# Altium PCB TPI_Carte_Alimentation.PcbDoc
Units mm, origin at the board's own origin, x right, y up, seen from the top; angles counter-clockwise.
Board outline 102.05 x 48.01 mm, 2 copper layers (Top Layer, Bottom Layer); 7 components, 9 nets, 39 pads, 0 vias.
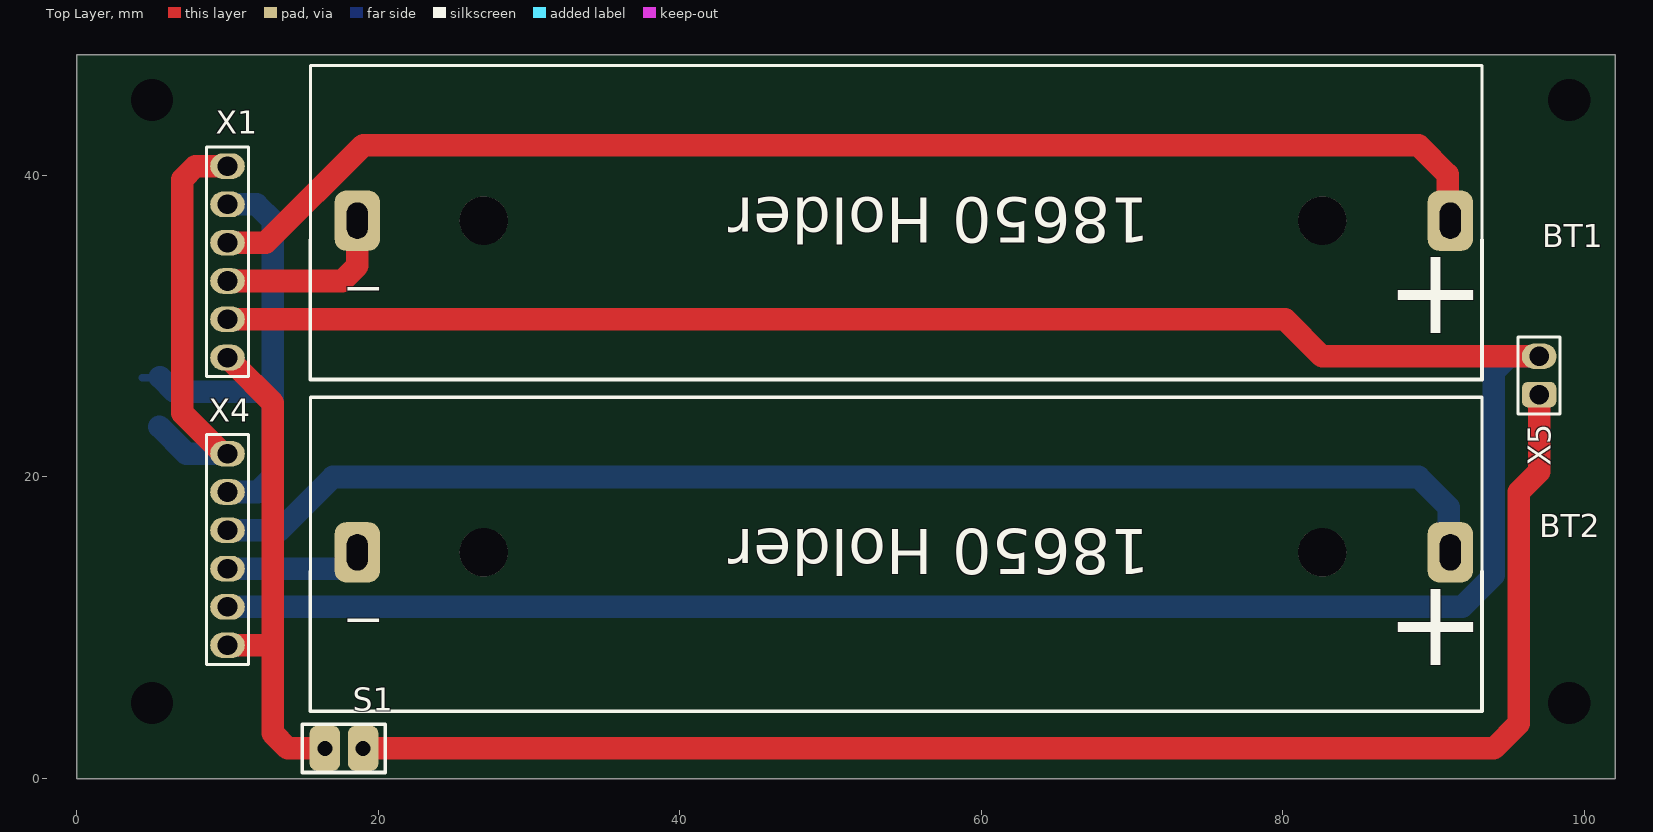
[diagram p0: Top Layer view]
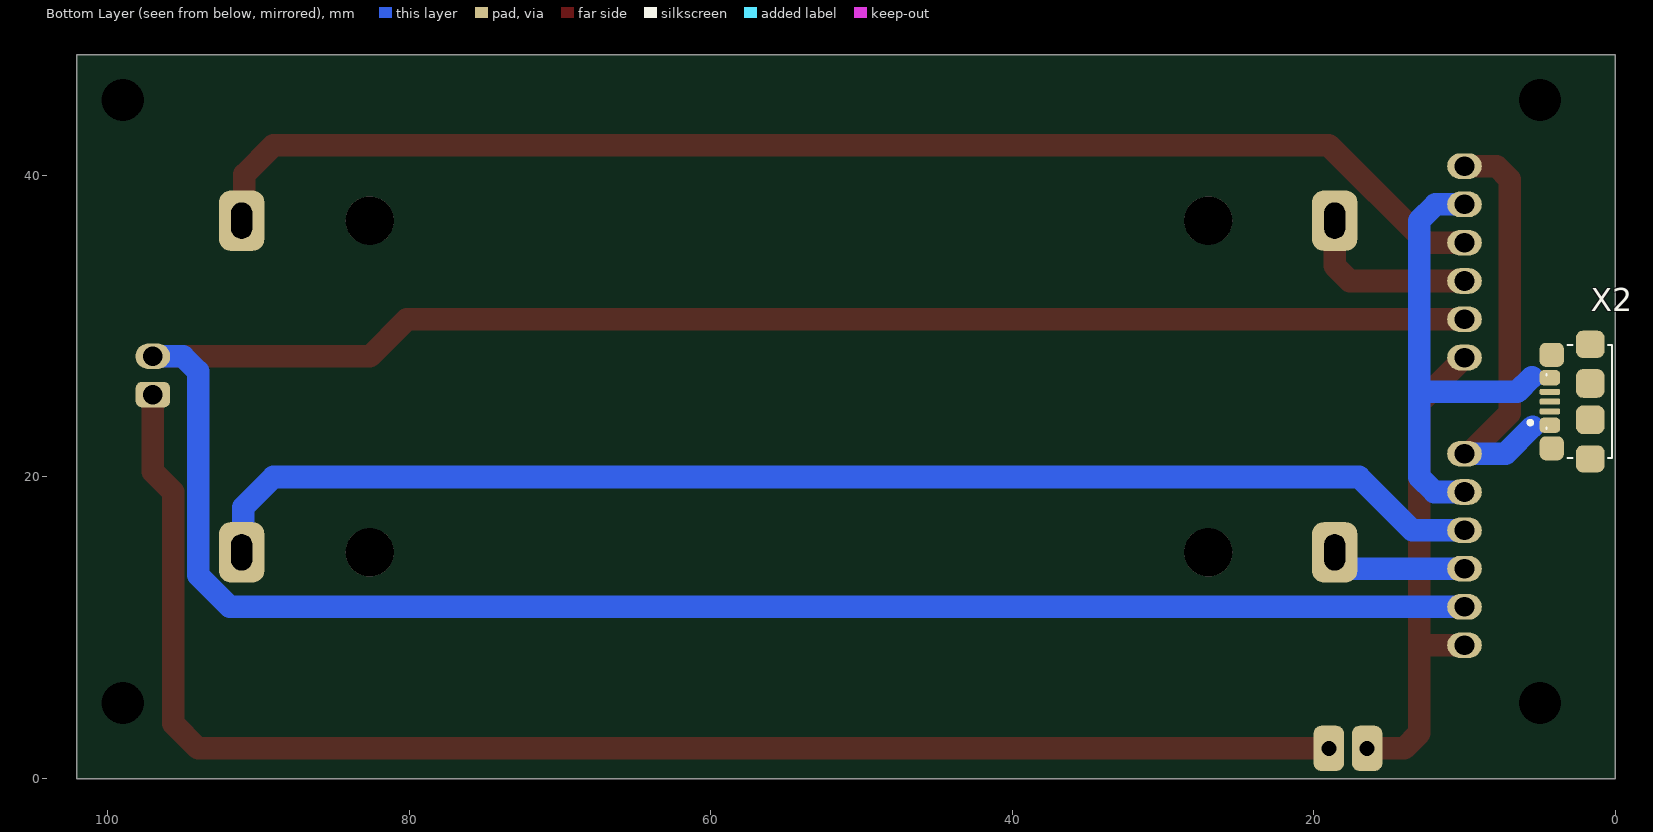
[diagram p1: Bottom Layer view, seen from below]
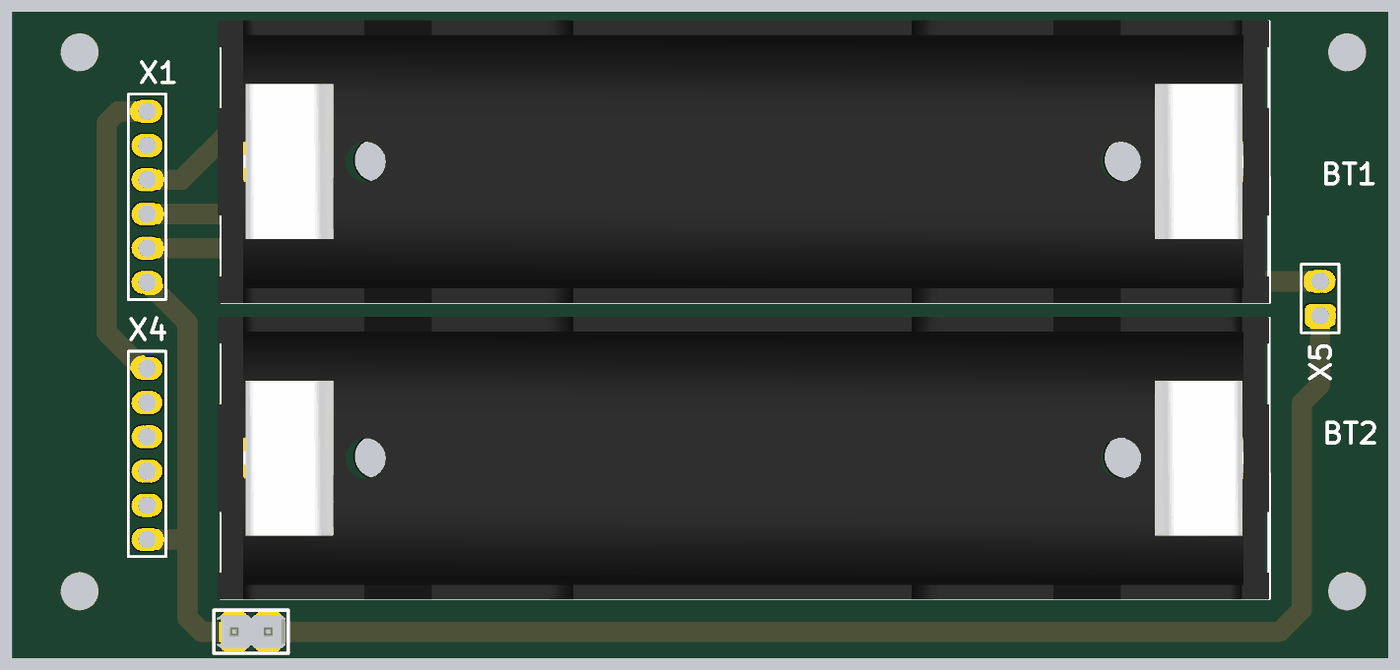
[diagram p2: 3D render of the assembled board from above, using the file's embedded part models]

## Layer stack, top to bottom
Top Solder: solder mask 0.0102, Solder Resist, Dk 3.5
Top Layer: signal copper 0.0356
Dielectric1: dielectric 0.32, FR-4, Dk 4.8
Bottom Layer: signal copper 0.0356
Bottom Solder: solder mask 0.0102, Solder Resist, Dk 3.5

## Board outline
0,-0.003 102.05,-0.003 102.05,48.006 0,48.006

## Design rules (kind name [scope] priority, off if disabled: settings)
Clearance [All] p1: gap=0.2 ignorepadtopadclearanceinfootprint=FALSE except(0: Arc-Hole Track-Hole SMDPad-Hole THPad-Hole Via-Hole Fill-Hole Poly-Hole Region-Hole Text-Hole)
FabricationTestPointUsage TestPointUsage [All] p1: valid=0 allowmultiple=FALSE
FabricationTestpoint Testpoint [All] p1: side=3 testpointundercomponent=TRUE minsize=1.016 maxsize=2.54 preferedsize=1.524 minholesize=0 maxholesize=1.016 preferedholesize=0.813 testpointgrid=0.025 allowsidetop=TRUE allowsidebottom=TRUE usegrid=TRUE gridtolerance=0
HoleSize [All] p1: absolutevalues=TRUE maxlimit=5 minlimit=0.8 maxpercent=80.000 minpercent=20.000
HoleToHoleClearance [All] p1: gap=0.2 allowstackedmicrovias=TRUE
MinimumSolderMaskSliver [All] p1: minsoldermaskwidth=0.1
PlaneClearance [All] p1: clearance=0.5
PlaneConnect [All] p1: planeconnectstyle=Relief reliefexpansion=0.5 reliefentries=4 reliefconductorwidth=0.5 reliefairgap=0.3
PolygonConnect [All] p1: connectstyle=Relief reliefconductorwidth=0.254 reliefentries=4 polygonreliefangle="90 Angle" airgapwidth=0.254
RoutingVias [All] p1: holewidth=0.8 width=1.8 viastyle="Through Hole" minholewidth=0.8 minwidth=1.8 maxholewidth=1.7 maxwidth=3
SilkToSilkClearance [All] p1: silktosilkclearance=0.2
SilkToSolderMaskClearance SilkscreenOverComponentPads [IsPad] p1: minsilkscreentomaskgap=0.254 clearancetoexposedcopper=TRUE
SolderMaskExpansion [All] p1: expansion=0.102 istentingtop=FALSE
Width [All] p1: maxlimit=2 minlimit=0.2 preferedwidth=0.5
21 further rules are at their usual default settings.

## Components (designator, comment, footprint, x,y, rotation, side; value= is the part's Value field where it differs from the comment)
BT1 "Batterie 3.7 V" 18650Holder_V1 91.11,37 r180 top
BT2 "Batterie 3.7 V" 18650Holder_V1 91.11,15 r180 top
S1 "?" MOLEX_0022284020 16.46,2 r0 top
X1 "Header6x1_M" HDR6X1_M 10,34.27 r270 top
X2 "Micro_USB" MICRO_USB 3,25 r90 bottom
X4 "Header6x1_M" HDR6X1_M 10,15.19 r270 top
X5 "Header2x1_M" HDR2X1_M 97,26.73 r90 top

## Footprints (in the part's own frame and the unit in brackets; to place one, negate y for a bottom-side part, rotate by r counter-clockwise, add the part's x,y. Pads: shape width x height; smd on the part's side, far side on the other; paste and mask are expansions set on the pad)
18650Holder_V1 [mm] "VF_Divers_E05_V1.0_Support18650PCB"
  rrect50% 3x4 hole 1.4 slot 2.4 at 90 deg: 1(0,0) 2(72.5,0)
  round 3.2 hole 3.2 unplated: ""(8.5,0) ""(64.11,0)
  silkscreen extent -2.1,-10.29 75.62,10.54, body extent -2.1,-10.37 75.9,10.63, height 21.1
HDR2X1_M [mm] "Connector; Header; 2x1 Position; Straight"
  rrect50% 1.7x2.3 hole 1.3: 1(-1.27,0)
  oval 1.7x2.3 hole 1.3: 2(1.27,0)
  silkscreen extent -2.54,-1.4 2.54,1.4, body extent -2.54,-1.27 2.54,1.27, height 9.27
HDR6X1_M [mm] "Connector; Header; 6x1 Position; Straight"
  oval 1.7x2.3 hole 1.3: 1(-6.35,0) 2(-3.81,0) 3(-1.27,0) 4(1.27,0) 5(3.81,0) 6(6.35,0)
  silkscreen extent -7.62,-1.4 7.62,1.4, body extent -7.61,-1.27 7.63,1.27, height 9.27
MICRO_USB [mm] "Connecteur USB micro B"
  rrect50% 1x1.35 smd: 1(-1.57,1.338) 5(1.58,1.338)
  rrect50% 0.4x1.35 smd: 2(-0.65,1.338) 3(0,1.338) 4(0.65,1.338)
  rrect50% 1.8x1.9 smd: ""(-3.8,-1.338) ""(3.8,-1.338)
  rrect50% 1.6x1.6 smd: ""(-3.1,1.212) ""(3.1,1.212)
  rrect50% 1.9x1.9 smd: ""(-1.2,-1.338) ""(1.2,-1.338)
  silkscreen extent -3.75,-2.79 3.75,2.74
MOLEX_0022284020 [mm] "JUMPER"
  rrect50% 2.032x3 hole 1: 1(0,0) 2(2.54,0)
  silkscreen extent -1.5,-1.6 4,1.6, body extent -1.27,-1.24 3.81,1.24, height 8.39

## Part data
BT1 BT2: library part Battery, "Multicell Battery", LatestRevisionDate=17-Jul-2002, LatestRevisionNote="Re-released for DXP Platform.", PackageDescription="Battery; 2 Leads", PackageReference=BAT-2, Published=24-Mar-1999, Publisher="Altium Limited"
S1: library part Switch_NO, "Switch Normaly Open"
X1 X4: library part CMP-031-000013-3, "WURTH ELEKTRONIK - 61300611121 - Pin Header, Board-to-Board, 2.54 mm, 1 Rows, 6 Contacts, Through Hole, WR-PHD Series", Color=Black, Current Rating=3A, Manufacturer="Wurth Electronics", Manufacturer Part Number=61300611121, Max Operating Temperature=125°C, Min Operating Temperature=-40°C, Voltage Rating=250V, Category="Headers and Wire Housings", ComponentLink1Description=http://www.mouser.com/ds/2/445/6130xx11121-538006.pdf?src-supplier=Mouser, ComponentLink1URL=http://www.mouser.com/ds/2/445/6130xx11121-538006.pdf?src-supplier=Mouser, ComponentLink2Description=https://katalog.we-online.de/em/datasheet/6130xx11121.pdf?src-supplier=Digi-Key, ComponentLink2URL=https://katalog.we-online.de/em/datasheet/6130xx11121.pdf?src-supplier=Digi-Key, ComponentLink3Description=http://www.farnell.com/cad/1737268.pdf?src-supplier=Element14, ComponentLink3URL=http://www.farnell.com/cad/1737268.pdf?src-supplier=Element14, Connector Type="Male Pin", Contact Gender=Male, Contact Material="Copper Alloy,Copper", Contact Mating Length=0.236inch, Contact Plating=Gold, Design Item ID=Header6x1_M, Gender=Male, Housing Material=PBT, Lead Free="Lead Free", Mount="Through Hole", Number of Contacts=6, Number of Positions=6, Number of Rows=1, Packaging=Bulk, Pitch=0.1inch, Pricing 1="1=0.33000, 10=0.27900, 50=0.19400, 100=0.17600, 1000=0.16000, 10000=0.16000 (USD)", Pricing 2="1=0.33000, 10=0.27900, 25=0.23200, 50=0.19400, 100=0.17600, 1000=0.16000 (USD)", REACH SVHC=Unknown, RoHS=Yes, Source=MEION_Connectors.SchLib, Stock 1=7278, Stock 2=46170, Termination="Through Hole"
X2: Supplier Part Number=609-4613-2-ND, Supplier 1=Digi-Key
X5: library part CMP-031-000003-4, "WR-PHD 2.54 mm THT Pin Header", Color=Black, Current Rating=3A, Manufacturer="Wurth Electronics", Manufacturer Part Number=61300211121, Max Operating Temperature=125°C, Min Operating Temperature=-40°C, Voltage Rating=250V, Category="Headers and Wire Housings", ComponentLink1Description=https://datasheet.ciiva.com/13619/6130xx11121-48870-13619345.pdf?src-supplier=Mouser, ComponentLink1URL=https://datasheet.ciiva.com/13619/6130xx11121-48870-13619345.pdf?src-supplier=Mouser, Connector Type="Male Pin", Contact Gender=Male, Contact Material="Copper Alloy,Copper", Contact Mating Length=0.236inch, Contact Plating=Gold, Design Item ID=Header2x1_M, Gender=Male, Housing Material=PBT, Lead Free="Lead Free", Mount="Through Hole", Number of Contacts=2, Number of Positions=2, Number of Rows=1, Packaging=Bulk, Pitch=0.1inch, REACH SVHC=Unknown, RoHS=Yes, Source=MEION_Connectors.SchLib, Stock 1=68226, Termination="Through Hole"

## Free pads (board coordinates)
  round 1.524 hole 2.8: 2(5,5) 2(5,45) 2(99,5) 2(99,45)

## Nets (pads, with @x,y where several pads share a name; then routed paths per layer and width w, separated by ;. In a path a pad name is that pad's centre, name@x,y a point inside that pad or via, vN(x,y) a via of type N, cw(c..) or ccw(c..) an arc to the next point about the centre after c; other vN are vias at no path point)
GND_CH: X1.2 X2.5 X4.2 | length 32.9
  Bottom Layer w0.5: X2.5 5.485,26.58 5.526,26.622
  Bottom Layer w1.5: 5.526,26.622 6.497,25.65 13,25.65 ; X4.2 12,19 13,20 13,25.65 ; X1.2 11.92,38.08 13,37 13,25.65
GND_O: X1.5 X4.5 X5.2 | length 189.8
  Top Layer w1.5: X1.5 80.15,30.46 82.61,28 X5.2
  Bottom Layer w1.5: X4.5 91.894,11.38 94,13.486 94,27 95,28 X5.2
NetS1_2: S1.2 X5.1 | length 99.7
  Top Layer w1.5: S1.2 94,2 95.65,3.65 95.65,19 97,20.35 X5.1
V+BAT1: BT1.1 X1.3 | length 87.5
  Top Layer w1.5: X1.3 12.54,35.54 19,42 89,42 90.934,40.066 90.934,37.176 BT1.1
V+BAT2: BT2.1 X4.3 | length 86.3
  Bottom Layer w1.5: X4.3 13.46,16.46 17,20 89,20 91,18 91,15.11 BT2.1
V-BAT1: BT1.2 X1.4 | length 12
  Top Layer w1.5: X1.4 17.61,33 18.61,34 BT1.2
V-BAT2: BT2.2 X4.4 | length 9.3
  Bottom Layer w1.5: X4.4 17.86,13.92 18.61,14.67 BT2.2
V_O: S1.1 X1.6 X4.6 | length 33.2
  Top Layer w1.5: X4.6 12.84,8.84 13,9 ; X1.6 10.246,27.92 10.338,27.828 10.338,27.582 13,24.92 13,9 ; S1.1 14,2 13,3 13,9
VCH: X1.1 X2.1 X4.1 | length 28.2
  Top Layer w1.5: X4.1 9.7,21.54 7,24.24 7,39.741 7.879,40.62 X1.1
  Bottom Layer w1.5: 5.485,23.337 7.282,21.54 X4.1
pads on no net: BT1. BT2. X2. X2.2 X2.3 X2.4

## Silkscreen, mask and mechanical layers (free items; w line width, h text height)
Board_geometry:
  lines w0.254: 0,-0.003 102,-0.003 102,48.006 0,48.006 0,-0.003
Text_box:
  drawing of 61 lines, arcs and shapes, not listed
  text "1" at -32.134,78.212 h2
  text "2" at 40.51,78.212 h2
  text "3" at 113.662,78.212 h2
  text "4" at 186.56,78.212 h2
  text "A" at -66.475,55.2 h2
  text "A" at 220.545,55.2 h2
  text "B" at -66.475,7.143 h2
  text "B" at 220.545,7.143 h2
  text "C" at -66.475,-41.371 h2
  text "C" at 220.545,-41.371 h2
  text "DATE:" at 170.38,-78.379 h2
  text ".PRINT_DATE" at 193.24,-78.379 h2
  text "TPI_Carte_Alimentation" at 97.99,-82.951 h4
  text "PCB DESIGNER:" at 170.38,-84.729 h2
  text "Rafael Donadello" at 193.24,-84.729 h2
  text "D" at -66.475,-89.377 h2
  text "D" at 220.545,-89.377 h2
  text "ENGINEER:" at 170.38,-91.079 h2
  text "Rafael Donadello" at 193.24,-91.079 h2
  text "1" at 97.99,-93.619 h3
  text "REV.:" at 170.38,-97.429 h2
  text "1.0" at 193.24,-97.429 h2
  text "FILE NAME:" at 56.08,-101.239 h2
  text ".PCB_FILE_NAME" at 68.78,-103.779 h2
  text "SCALE" at 170.38,-103.779 h2
  text "1:1" at 183.08,-103.779 h2
  text "FORMAT" at 197.05,-103.779 h2
  text "A4" at 209.75,-103.779 h2
  text "1" at -32.134,-109.748 h2
  text "2" at 40.51,-109.748 h2
  text "3" at 113.662,-109.748 h2
  text "4" at 186.56,-109.748 h2
Drill Drawing:
  circle w0.254: c-59.33,-42.342 r0.847
  lines w0.254: -60.177,-56.735 -58.483,-56.735 -59.33,-58.429 -60.177,-56.735 ; -60.177,-54.619 -59.33,-54.195 -58.483,-54.619 -58.907,-53.772 -58.483,-52.925 -59.33,-53.349 -60.177,-52.925 -59.753,-53.772 -60.177,-54.619 ; -60.177,-50.809 -58.483,-50.809 -58.483,-49.115 -60.177,-49.115 -60.177,-50.809 ; -60.177,-46.999 -60.177,-46.575 -59.753,-46.152 -60.177,-45.729 -60.177,-45.305 -59.753,-45.305 -59.33,-45.729 -58.907,-45.305 -58.483,-45.305 -58.483,-45.729 -58.907,-46.152 -58.483,-46.575 -58.483,-46.999 -58.907,-46.999 -59.33,-46.575 -59.753,-46.999 -60.177,-46.999
  lines w0.381: -61.695,-59.572 28.35,-59.572 ; -61.695,-40.522 28.35,-40.522 ; -47.703,-63.382 -47.703,-36.712 ; -33.991,-63.382 -33.991,-36.712 ; -4.281,-63.382 -4.281,-36.712 ; 8.568,-63.382 8.568,-36.712 ; -61.695,-63.382 28.35,-63.382 28.35,-36.712 -61.695,-36.712 -61.695,-63.382
  text "Symbol" at -59.409,-39.379 h1.83
  text "Count" at -46.56,-39.379 h1.83
  text "Hole Size" at -32.848,-39.379 h1.83
  text "Plated" at -3.138,-39.379 h1.83
  text "Hole Type" at 9.711,-39.379 h1.83
  text "2" at -46.56,-43.189 h1.52
  text "39,37mil (1,000mm)" at -32.848,-43.189 h1.52
  text "PTH" at -3.138,-43.189 h1.52
  text "Round" at 9.711,-43.189 h1.52
  text "14" at -46.56,-46.999 h1.52
  text "51,18mil (1,300mm)" at -32.848,-46.999 h1.52
  text "PTH" at -3.138,-46.999 h1.52
  text "Round" at 9.711,-46.999 h1.52
  text "4" at -46.56,-50.809 h1.52
  text "55,12mil (1,400mm)" at -32.848,-50.809 h1.52
  text "PTH" at -3.138,-50.809 h1.52
  text "Slot" at 9.711,-50.809 h1.52
  text "4" at -46.56,-54.619 h1.52
  text "110,24mil (2,800mm)" at -32.848,-54.619 h1.52
  text "PTH" at -3.138,-54.619 h1.52
  text "Round" at 9.711,-54.619 h1.52
  text "4" at -46.56,-58.429 h1.52
  text "125,98mil (3,200mm)" at -32.848,-58.429 h1.52
  text "NPTH" at -3.138,-58.429 h1.52
  text "Round" at 9.711,-58.429 h1.52
  text "28 Total" at -46.56,-62.239 h1.52
  text "Slot definitions :" at -59.409,-65.921 h1.52
  text "Routed Path Length" at -33.179,-65.921 h1.52
  text "= Calculated from tool start centre position to tool end centre position." at -5.171,-65.921 h1.52
  text "Hole Length" at -33.179,-68.46 h1.52
  text "= Routed Path Length + Tool Size = Slot length as defined in the PCB layout" at -15.582,-68.46 h1.52

## Dimensions
5,5 to 99,5 on Drill Drawing
102,48.006 to 0,48.006 on Drill Drawing
99.33,44.5 to 99,5 on Drill Drawing
102,48.006 to 102,-0.003 on Drill Drawing

## Text inside footprints (layer, text, board x,y; h text height)
BT1: Top Overlay "+" at 86.801,27.602 h10; Top Overlay "-" at 17.586,28.618 h10; Top Overlay "18650 Holder" at 71.18,38.524 h3 r180
BT2: Top Overlay "18650 Holder" at 71.18,16.524 h3 r180; Top Overlay "-" at 17.586,6.618 h10; Top Overlay "+" at 86.801,5.602 h10